# Altium PCB Art_Imp.PcbDoc
Units mm, origin at the board's own origin, x right, y up, seen from the top; angles counter-clockwise.
Board outline 65 x 59 mm, 2 copper layers (Top Layer, Bottom Layer); 38 components, 21 nets, 110 pads, 848 vias.
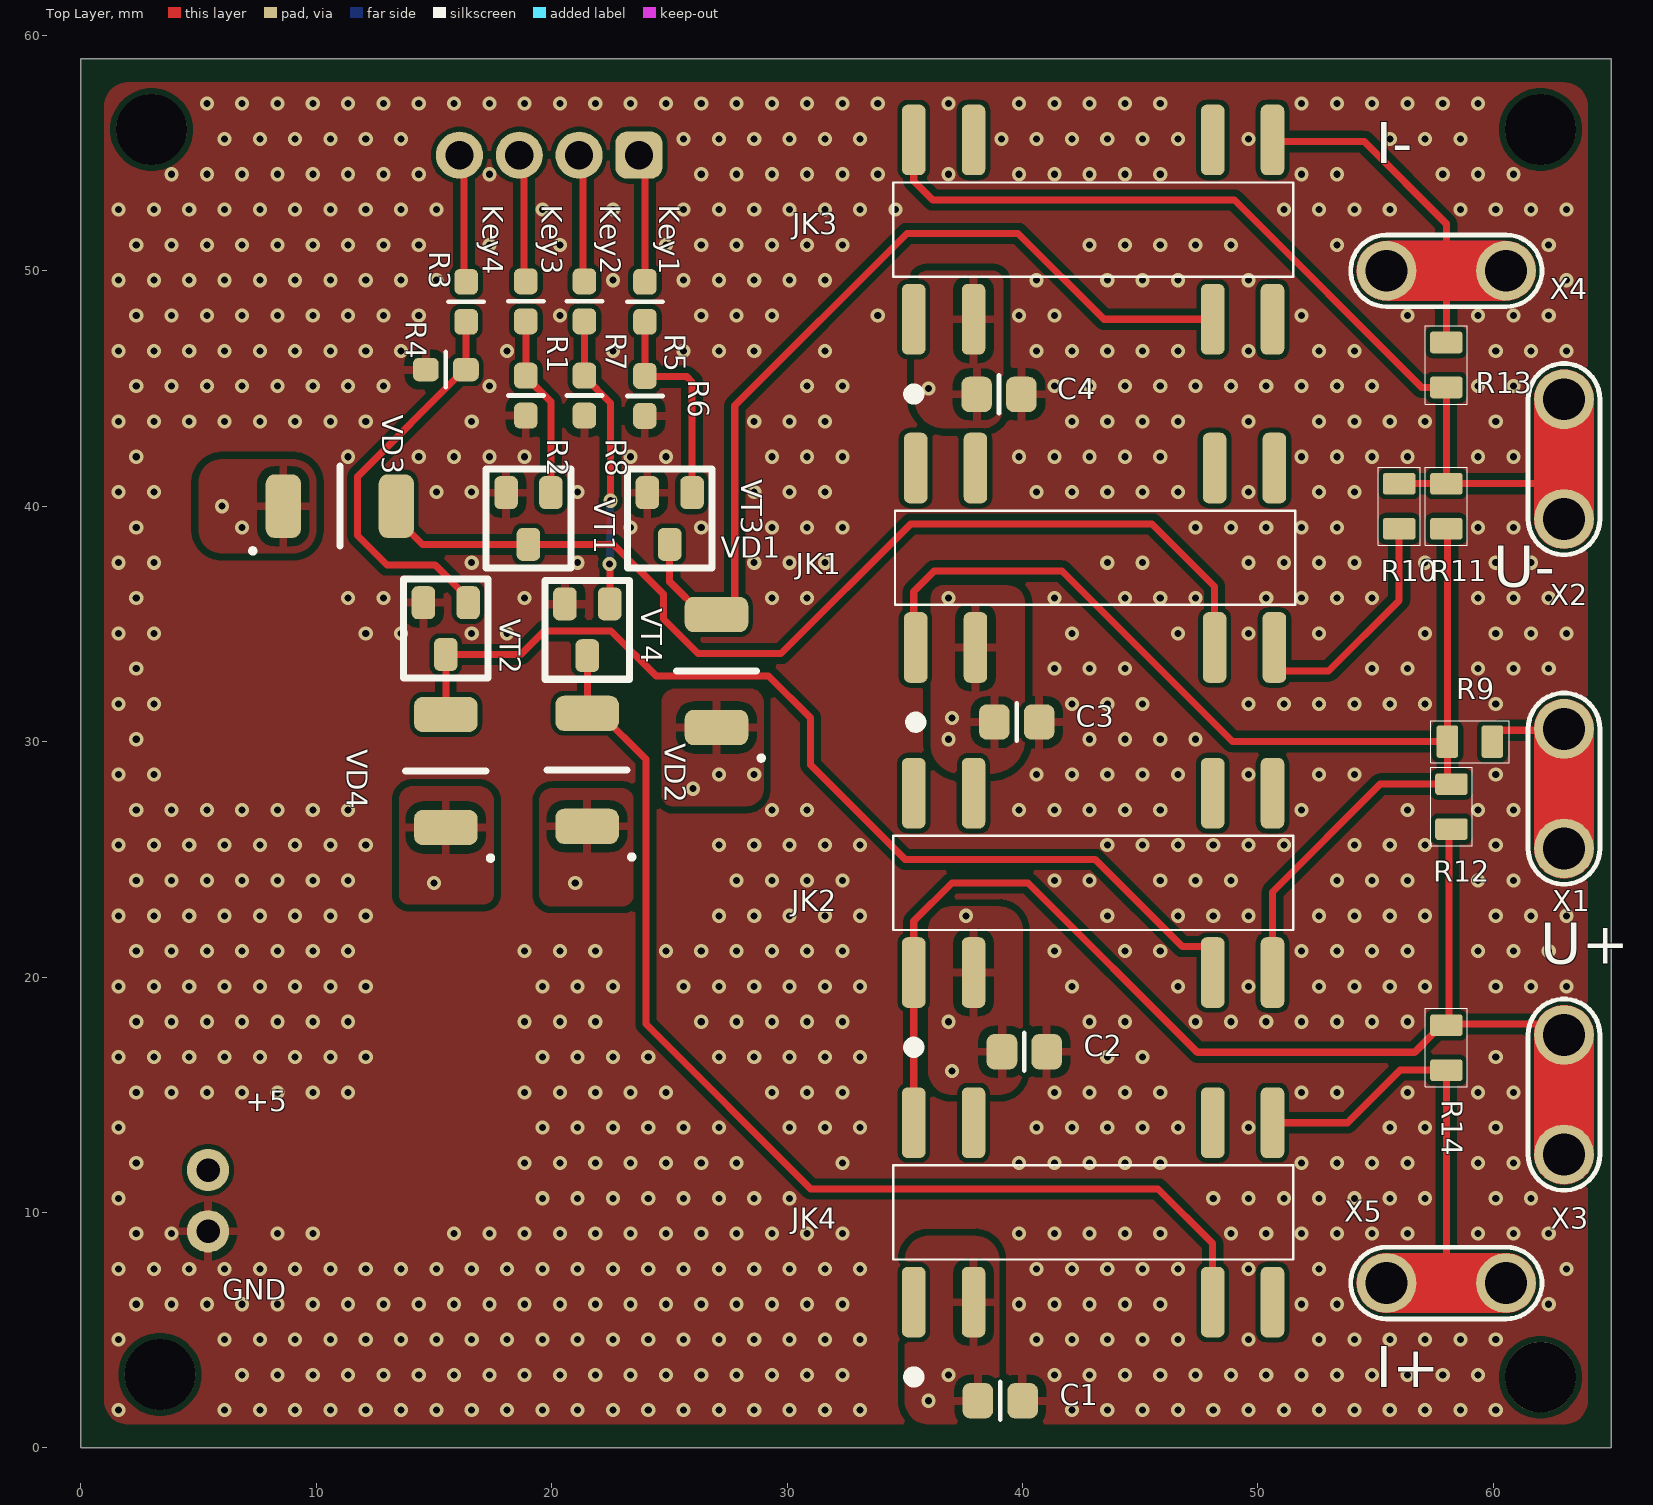
[diagram p0: Top Layer view]
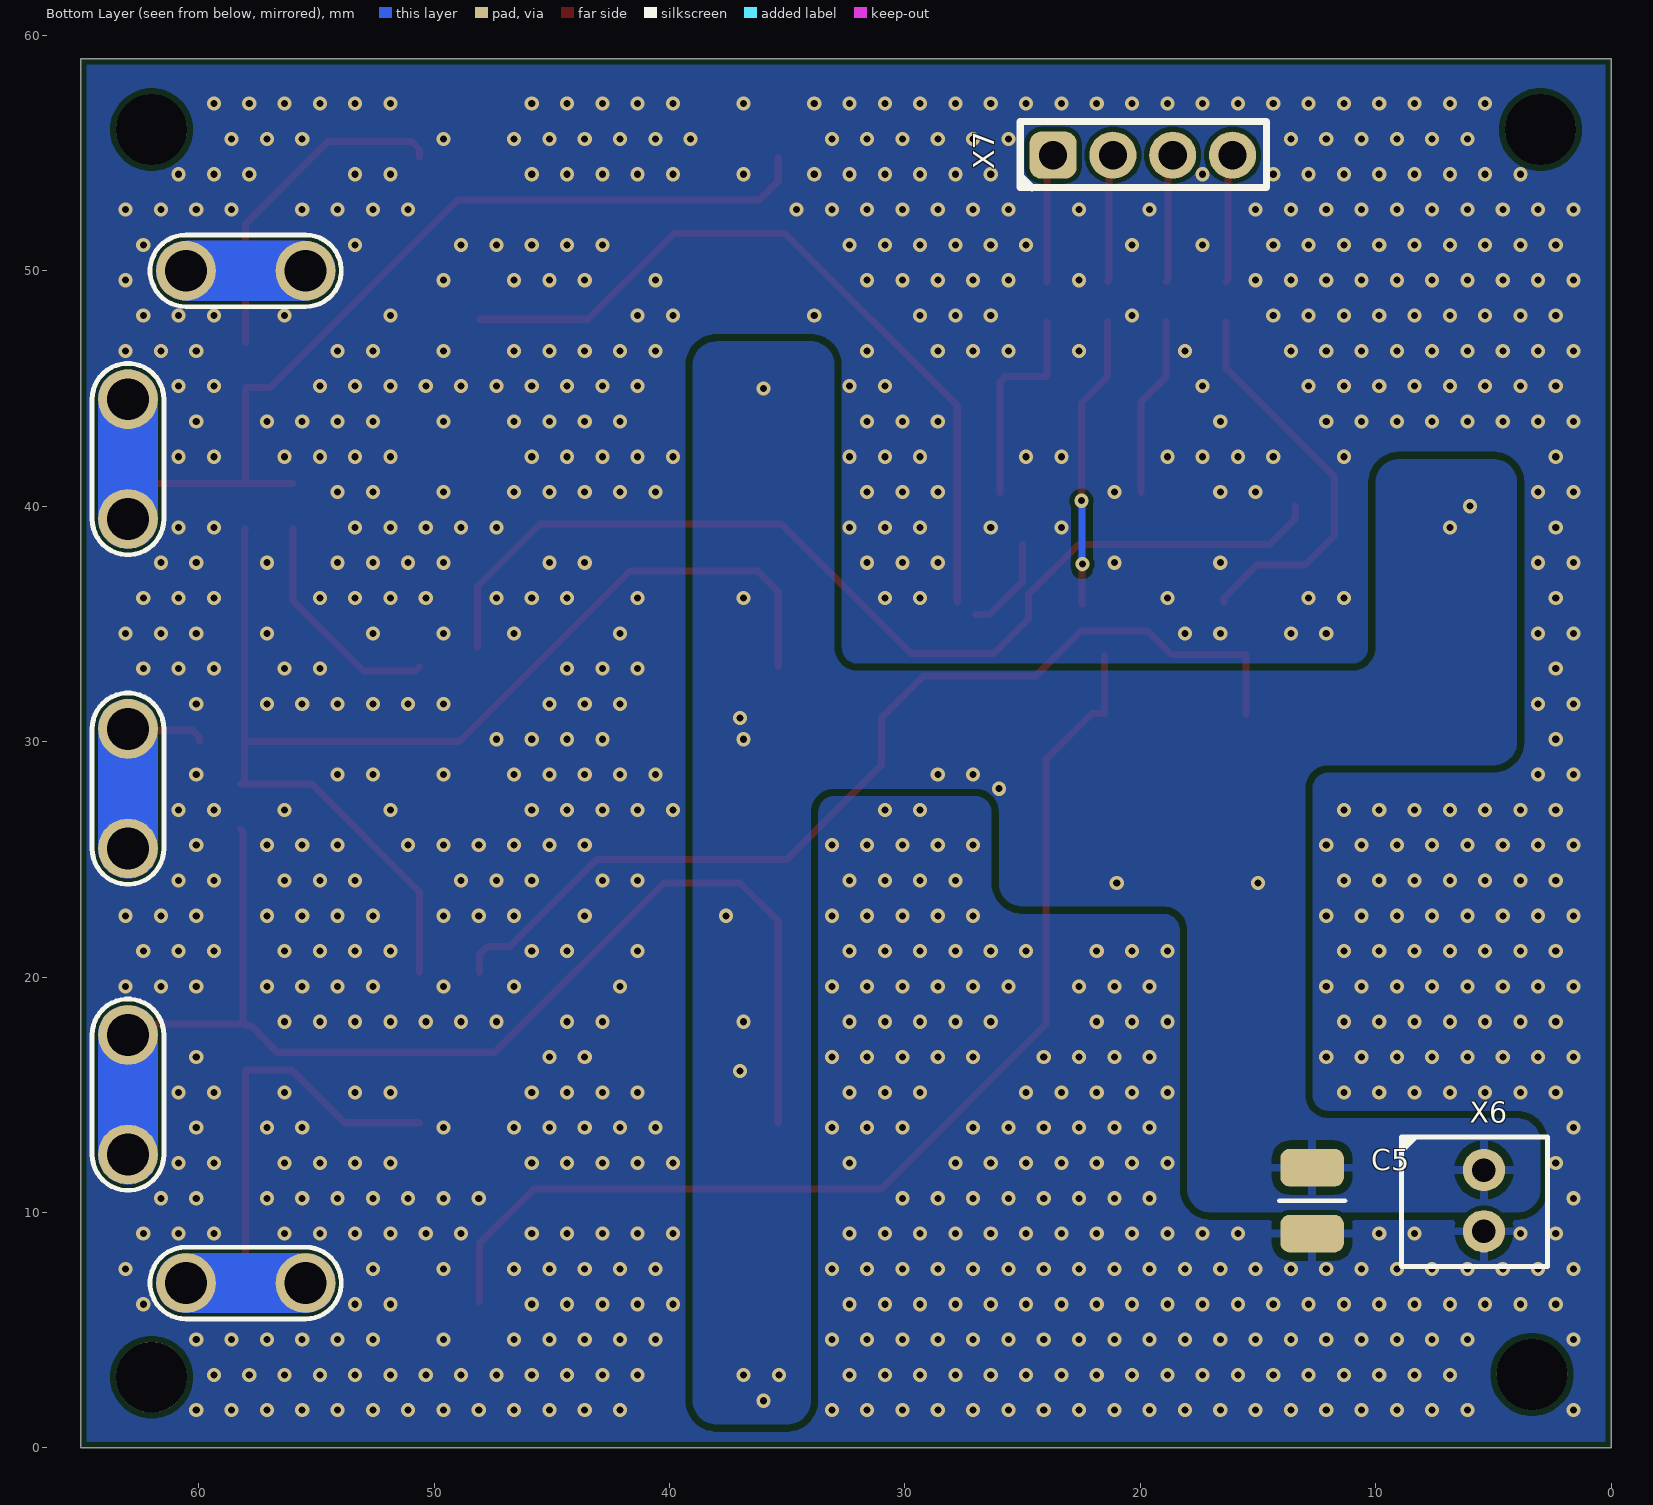
[diagram p1: Bottom Layer view, seen from below]

## Layer stack, top to bottom
Top Solder: solder mask 0.025, SM-004, Dk 4
Top Layer: signal copper 0.0175
Dielectric 1: dielectric 0.32, FR-4, Dk 4.8
Bottom Layer: signal copper 0.0175
Bottom Solder: solder mask 0.025, SM-004, Dk 4

## Board outline
0,0 65,0 65,59 0,59

## Design rules (kind name [scope] priority, off if disabled: settings)
AcuteAngle [All] p1: minimum=3.50000000000000E+0001 checktracksonly=FALSE
BoardOutlineClearance "BoardOutlineClearance 1" [All] p1: gap=0.25 ignorepadtopadclearanceinfootprint=FALSE except(0: Arc-SplitContinuation Track-SplitContinuation SMDPad-SplitContinuation THPad-SplitContinuation Via-SplitContinuation Fill-SplitContinuation Poly-SplitContinuation Region-SplitContinuation Text-SplitContinuation) // Milling
BoardOutlineClearance "BoardOutlineClearance 2" [All] p2: gap=0.4 ignorepadtopadclearanceinfootprint=FALSE except(0: Arc-SplitContinuation Track-SplitContinuation SMDPad-SplitContinuation THPad-SplitContinuation Via-SplitContinuation Fill-SplitContinuation Poly-SplitContinuation Region-SplitContinuation Text-SplitContinuation) // V-Cut
Clearance "Clearance 3 Oz" [InNet('No Net') vs InNet('No Net')] p1 off: gap=0.35 ignorepadtopadclearanceinfootprint=FALSE except(0.25: Arc-Hole Track-Hole SMDPad-Hole THPad-Hole Via-Hole Fill-Hole Poly-Hole Region-Hole Text-Hole)
Clearance "Clearance 2 Oz" [InNet('No Net') vs InNet('No Net')] p2 off: gap=0.3 ignorepadtopadclearanceinfootprint=FALSE except(0.25: Arc-Hole Track-Hole SMDPad-Hole THPad-Hole Via-Hole Fill-Hole Poly-Hole Region-Hole Text-Hole)
Clearance "Clearance-1 1 Oz" [All] p3: gap=0.2 ignorepadtopadclearanceinfootprint=FALSE except(0.25: Arc-Hole Track-Hole SMDPad-Hole THPad-Hole Via-Hole Fill-Hole Poly-Hole Region-Hole Text-Hole; 0.3: Arc-Fill Arc-Poly Arc-Region Track-Fill Track-Poly Track-Region Fill-Fill Fill-Poly Fill-Region Poly-Poly Poly-Region Region-Region) // Standart
Clearance "Clearance-2 1 Oz" [InNet('No Net') vs InNet('No Net')] p4: gap=0.15 ignorepadtopadclearanceinfootprint=FALSE except(0.2: Arc-Fill Arc-Poly Track-Fill Track-Poly SMDPad-Fill SMDPad-Poly THPad-Fill THPad-Poly Via-Fill Via-Poly Fill-Fill Fill-Poly Poly-Poly; 0.25: Arc-Hole Track-Hole SMDPad-Hole THPad-Hole Via-Hole Fill-Hole Poly-Hole Region-Hole Text-Hole) // Advance
Clearance "Clearance-1 1/2 Oz" [InNet('No Net') vs InNet('No Net')] p5: gap=0.125 ignorepadtopadclearanceinfootprint=FALSE except(0.2: Arc-Fill Arc-Poly Track-Fill Track-Poly SMDPad-SMDPad SMDPad-Fill SMDPad-Poly THPad-Fill THPad-Poly Via-Fill Via-Poly Fill-Fill Fill-Poly Poly-Poly Poly-Region Poly-Text; 0.25: Arc-Hole Track-Hole SMDPad-Hole THPad-Hole Via-Hole Fill-Hole Poly-Hole Region-Hole Text-Hole) // Standart
Clearance "Clearance-2 1/2 Oz" [InNet('No Net') vs InNet('No Net')] p6: gap=0.1 ignorepadtopadclearanceinfootprint=FALSE except(0.15: Arc-Fill Arc-Poly Track-Fill Track-Poly SMDPad-SMDPad SMDPad-Fill SMDPad-Poly THPad-Fill THPad-Poly Via-Fill Via-Poly Fill-Fill Fill-Poly Poly-Poly Poly-Region Poly-Text; 0.25: Arc-Hole Track-Hole SMDPad-Hole THPad-Hole Via-Hole Fill-Hole Poly-Hole Region-Hole Text-Hole) // Advance
DiffPairsRouting "DiffPairsRouting 1 Oz" [All] p1: maxlimit=0.254 minlimit=0.2 mostfreqgap=0.254 toplayer_minwidth=0.2 toplayer_maxwidth=0.381 toplayer_prefwidth=0.381 bottomlayer_minwidth=0.2 bottomlayer_maxwidth=0.381 bottomlayer_prefwidth=0.381 maxuncoupledlength=12.7
DiffPairsRouting "DiffPairsRouting 1/2 Oz" [All] p2: maxlimit=0.254 minlimit=0.1 mostfreqgap=0.254 toplayer_minwidth=0.1 toplayer_maxwidth=0.381 toplayer_prefwidth=0.381 bottomlayer_minwidth=0.1 bottomlayer_maxwidth=0.381 bottomlayer_prefwidth=0.381 maxuncoupledlength=12.7
HoleSize "Minimum HoleSize" [IsPad] p1: absolutevalues=TRUE maxlimit=5.9 minlimit=0.6 maxpercent=80.000 minpercent=20.000
HoleSize "Minimum HoleSize VIA 1" [IsVia] p2: absolutevalues=TRUE maxlimit=5.9 minlimit=0.3 maxpercent=80.000 minpercent=20.000 // Standart
HoleSize "Minimum HoleSize VIA 2" [IsVia] p3: absolutevalues=TRUE maxlimit=5.9 minlimit=0.2 maxpercent=80.000 minpercent=20.000 // Advance
HoleToHoleClearance Hole2HoleClearance [All] p1: gap=0.25 allowstackedmicrovias=FALSE
MinimumAnnularRing "Minimum AR VIA Standart" [IsVia] p1: minimumring=0.15
MinimumAnnularRing "Minimum AR PAD Standart" [IsPAD] p2: minimumring=0.2
MinimumAnnularRing "Minimum AR VIA Advance" [IsVia] p3: minimumring=0.1
MinimumAnnularRing "Minimum AR PAD Advance" [IsPAD] p4: minimumring=0.15
MinimumSolderMaskSliver "SolderMask Bridge Standart" [All] p1: minsoldermaskwidth=0.1 // All Masks
MinimumSolderMaskSliver "SolderMask Bridge Advance" [All] p2: minsoldermaskwidth=0.1 // Mask LDI
PlaneClearance "PlaneClearance 3 Oz" [InNet('No Net')] p1: clearance=0.35
PlaneClearance "PlaneClearance 2 Oz" [InNet('No Net')] p2: clearance=0.3
PlaneClearance "PlaneClearance 1 Oz" [All] p3: clearance=0.2
PlaneClearance "PlaneClearance-1 1/2 Oz" [InNet('No Net')] p4: clearance=0.2 // Standart
PlaneClearance "PlaneClearance-2 1/2 Oz" [InNet('No Net')] p5: clearance=0.15 // Advance
PlaneConnect "TermalConnect 3 Oz" [All] p1: planeconnectstyle=Relief reliefexpansion=0.2 reliefentries=4 reliefconductorwidth=0.35 reliefairgap=0.35 // Standart
PlaneConnect "TermalConnect 2 Oz" [All] p2: planeconnectstyle=Relief reliefexpansion=0.2 reliefentries=4 reliefconductorwidth=0.3 reliefairgap=0.3 // Standart
PlaneConnect "TermalConnect-1 1 Oz" [All] p3: planeconnectstyle=Relief reliefexpansion=0.2 reliefentries=4 reliefconductorwidth=0.2 reliefairgap=0.2 // Standart
PlaneConnect "TermalConnect-2 1 Oz" [All] p4: pad.planeconnectstyle=Relief pad.reliefexpansion=0.15 pad.reliefentries=4 pad.reliefconductorwidth=0.2 pad.reliefairgap=0.2 via.planeconnectstyle=Direct via.reliefexpansion=0.15 via.reliefentries=4 via.reliefconductorwidth=0.15 via.reliefairgap=0.15 // Advance
PlaneConnect "TermalConnect-1 1/2 Oz" [All] p5: planeconnectstyle=Relief reliefexpansion=0.2 reliefentries=4 reliefconductorwidth=0.2 reliefairgap=0.2 // Standart
PlaneConnect "TermalConnect-2 1/2 Oz" [All] p6: pad.planeconnectstyle=Relief pad.reliefexpansion=0.15 pad.reliefentries=4 pad.reliefconductorwidth=0.15 pad.reliefairgap=0.15 via.planeconnectstyle=Direct via.reliefexpansion=0.15 via.reliefentries=4 via.reliefconductorwidth=0.15 via.reliefairgap=0.15 // Advance
PolygonConnect "PolygonConnect 3 Oz" [All] p1: thpad.connectstyle=Relief thpad.reliefconductorwidth=0.35 thpad.reliefentries=4 thpad.polygonreliefangle="90 Angle" thpad.airgapwidth=0.35 smdpad.connectstyle=Relief smdpad.reliefconductorwidth=0.35 smdpad.reliefentries=4 smdpad.polygonreliefangle="90 Angle" smdpad.airgapwidth=0.35 via.connectstyle=Direct via.reliefconductorwidth=0.254 via.reliefentries=4 via.polygonreliefangle="90 Angle" via.airgapwidth=0.254
PolygonConnect "PolygonConnect 2 Oz" [InNet('No Net') vs InNet('No Net')] p2: thpad.connectstyle=Relief thpad.reliefconductorwidth=0.3 thpad.reliefentries=4 thpad.polygonreliefangle="90 Angle" thpad.airgapwidth=0.3 smdpad.connectstyle=Relief smdpad.reliefconductorwidth=0.3 smdpad.reliefentries=4 smdpad.polygonreliefangle="90 Angle" smdpad.airgapwidth=0.3 via.connectstyle=Direct via.reliefconductorwidth=0.254 via.reliefentries=4 via.polygonreliefangle="90 Angle" via.airgapwidth=0.254
PolygonConnect "PolygonConnect-1 1 Oz" [InNet('No Net') vs InNet('No Net')] p3: thpad.connectstyle=Relief thpad.reliefconductorwidth=0.2 thpad.reliefentries=4 thpad.polygonreliefangle="90 Angle" thpad.airgapwidth=0.2 smdpad.connectstyle=Relief smdpad.reliefconductorwidth=0.2 smdpad.reliefentries=4 smdpad.polygonreliefangle="90 Angle" smdpad.airgapwidth=0.2 via.connectstyle=Direct via.reliefconductorwidth=0.254 via.reliefentries=4 via.polygonreliefangle="90 Angle" via.airgapwidth=0.254 // Standart
PolygonConnect "PolygonConnect-2 1 Oz" [InNet('No Net') vs InNet('No Net')] p4: thpad.connectstyle=Relief thpad.reliefconductorwidth=0.15 thpad.reliefentries=4 thpad.polygonreliefangle="90 Angle" thpad.airgapwidth=0.15 smdpad.connectstyle=Relief smdpad.reliefconductorwidth=0.15 smdpad.reliefentries=4 smdpad.polygonreliefangle="90 Angle" smdpad.airgapwidth=0.15 via.connectstyle=Direct via.reliefconductorwidth=0.254 via.reliefentries=4 via.polygonreliefangle="90 Angle" via.airgapwidth=0.254 // Advance
PolygonConnect "PolygonConnect-1 1/2 Oz" [InNet('No Net') vs InNet('No Net')] p5: thpad.connectstyle=Relief thpad.reliefconductorwidth=0.15 thpad.reliefentries=4 thpad.polygonreliefangle="90 Angle" thpad.airgapwidth=0.2 smdpad.connectstyle=Relief smdpad.reliefconductorwidth=0.2 smdpad.reliefentries=4 smdpad.polygonreliefangle="90 Angle" smdpad.airgapwidth=0.2 via.connectstyle=Direct via.reliefconductorwidth=0.254 via.reliefentries=4 via.polygonreliefangle="90 Angle" via.airgapwidth=0.254 // Standart
PolygonConnect "PolygonConnect-2 1/2 Oz" [InNet('No Net') vs InNet('No Net')] p6: thpad.connectstyle=Relief thpad.reliefconductorwidth=0.125 thpad.reliefentries=4 thpad.polygonreliefangle="90 Angle" thpad.airgapwidth=0.15 smdpad.connectstyle=Relief smdpad.reliefconductorwidth=0.125 smdpad.reliefentries=4 smdpad.polygonreliefangle="90 Angle" smdpad.airgapwidth=0.15 via.connectstyle=Direct via.reliefconductorwidth=0.254 via.reliefentries=4 via.polygonreliefangle="90 Angle" via.airgapwidth=0.254 // Advance
RoutingCorners [All] p1 off: cornerstyle=45-Degree minsetback=2.54 maxsetback=2.54
RoutingVias [All] p1: holewidth=0.3 width=0.6 viastyle="Through Hole" minholewidth=0.2 minwidth=0.4 maxholewidth=5.9 maxwidth=6.4
SilkToSilkClearance Silk2SilkClearance [All] p1 off: silktosilkclearance=0.15
SilkToSolderMaskClearance Silk2SolderMaskClearance [IsPad] p1 off: minsilkscreentomaskgap=0.15 clearancetoexposedcopper=TRUE
SolderMaskExpansion SolderMaskExpansion-1 [All] p1: expansion=0.05 istentingtop=FALSE // Standart
SolderMaskExpansion "SolderMaskExpansion LDI" [All] p2: expansion=0.025 istentingtop=FALSE // Advance
SupplyNets "Schematic Supply Nets_1" [InNet('+5')] p1: voltage=0.000
SupplyNets "Schematic Supply Nets" [InNet('GNDA')] p2: voltage=0.000
UnRoutedNet [All] p1: checkbadconnections=TRUE
Width "Width 3 Oz" [All] p1 off: maxlimit=10 minlimit=0.3 preferedwidth=0.4 minimp=50.000000 maximp=50.000000 favimp=50.000000 checkconnectedcopper=TRUE
Width "Width 2 Oz" [All] p2 off: maxlimit=10 minlimit=0.3 preferedwidth=0.35 minimp=50.000000 maximp=50.000000 favimp=50.000000 checkconnectedcopper=TRUE
Width "Width 1 Oz" [All] p3: maxlimit=10 minlimit=0.15 preferedwidth=0.2 checkconnectedcopper=TRUE
Width "Width 1/2 Oz" [All] p4: maxlimit=10 minlimit=0.1 preferedwidth=0.125 checkconnectedcopper=TRUE
20 further rules are at their usual default settings.

## Components (designator, comment, footprint, x,y, rotation, side; value= is the part's Value field where it differs from the comment)
C1 "0.1u 50V 0805 ±10%" "CAP: SMD 0805 MD IPC 782" 39.05,2 r0 top
C2 "0.1u 50V 0805 ±10%" "CAP: SMD 0805 MD IPC 782" 40.075,16.825 r180 top
C3 "0.1u 50V 0805 ±10%" "CAP: SMD 0805 MD IPC 782" 39.751,30.83 r180 top
C4 "0.1u 50V 0805 ±10%" "CAP: SMD 0805 MD IPC 782" 39,44.75 r180 top
C5 "47u 16V 1210 ±20%" "CAP: SMD 1210 MD IPC 782" 12.7,10.5 r270 bottom
JK1 "TRR-1A-05-S-00R" TTR 43.083,37.81 r0 top
JK2 "TRR-1A-05-S-00R" TTR 43,24 r0 top
JK3 "TRR-1A-05-S-00R" TTR 43,51.75 r0 top
JK4 "TRR-1A-05-S-00R" TTR 43,10 r0 top
R1 "10k ±1% 0603" "RES: SMD 0603 MD IPC 782" 18.899,48.7 r90 top
R2 "10k ±1% 0603" "RES: SMD 0603 MD IPC 782" 18.899,44.7 r90 top
R3 "10k ±1% 0603" "RES: SMD 0603 MD IPC 782" 16.367,48.683 r90 top
R4 "10k ±1% 0603" "RES: SMD 0603 MD IPC 782" 15.5,45.8 r0 top
R5 "10k ±1% 0603" "RES: SMD 0603 MD IPC 782" 23.955,48.683 r90 top
R6 "10k ±1% 0603" "RES: SMD 0603 MD IPC 782" 23.955,44.683 r90 top
R7 "10k ±1% 0603" "RES: SMD 0603 MD IPC 782" 21.39,48.7 r90 top
R8 "10k ±1% 0603" "RES: SMD 0603 MD IPC 782" 21.39,44.7 r90 top
R9 "100R" 0805 59,30 r180 top
R10 "100R" 0805 56,40 r90 top
R11 "100R" 0805 58,40 r90 top
R12 "100R" 0805 58.219,27.239 r90 top
R13 "2.4k" 0805 58,46 r90 top
R14 "2.4k" 0805 58,17 r270 top
VD1 "SM4002-W 1A 100V" "DIODE: MELF" 27,33 r270 top
VD2 "SM4002-W 1A 100V" "DIODE: MELF" 21.5,28.8 r270 top
VD3 "SM4002-W 1A 100V" "DIODE: MELF" 11,40 r180 top
VD4 "SM4002-W 1A 100V" "DIODE: MELF" 15.5,28.75 r270 top
VT1 "BC850C" "IC: SOT 23" 19.012,39.475 r270 top
VT2 "BC850C" "IC: SOT 23" 15.5,34.8 r270 top
VT3 "BC850C" "IC: SOT 23" 25.012,39.475 r270 top
VT4 "BC850C" "IC: SOT 23" 21.512,34.75 r270 top
X1 "DJ4.8" DJ4.8 63,28 r90 top
X2 "DJ4.8" DJ4.8 63,42 r90 top
X3 "DJ4.8" DJ4.8 63,15 r270 top
X4 "DJ4.8" DJ4.8 58,50 r180 top
X5 "DJ4.8" DJ4.8 58,7 r0 top
X6 "WF-2" "CON: 2pin wf-2" 5.9,10.5 r270 bottom
X7 "PLS-4" "CON: 4pin PLS-4" 19.892,54.911 r180 bottom

## Footprints (in the part's own frame and the unit in brackets; to place one, negate y for a bottom-side part, rotate by r counter-clockwise, add the part's x,y. Pads: shape width x height; smd on the part's side, far side on the other; paste and mask are expansions set on the pad)
0805 [mm]
  rrect25% 0.92x1.38 smd: 1(-0.955,0) 2(0.955,0)
  silkscreen extent -1.67,-0.89 1.66,0.89, body extent -1,-0.63 1,0.63, height 0.5
"CAP: SMD 0805 MD IPC 782" [mm]
  rrect50% 1.3x1.5 smd: 1(-0.95,0) 2(0.95,0)
  silkscreen extent 0,-0.8 0,0.8, body extent -1.4,-0.63 1.4,0.63, height 0.8
"CAP: SMD 1210 MD IPC 782" [mm]
  rrect50% 1.6x2.7 smd: 1(-1.4,0) 2(1.4,0)
  silkscreen extent 0,-1.4 0,1.4, body extent -2.47,-1.25 2.47,1.25, height 1.61
"CON: 2pin wf-2" [mm]
  round 1.8 hole 1: 1(-1.3,0.5) 2(1.3,0.5)
  silkscreen extent -2.7,-3 2.8,3.2, body extent -2.49,-2.8 2.59,3, height 11.56
"CON: 4pin PLS-4" [mm]
  rrect50% 2x2 hole 1.2: 1(-3.81,0)
  round 2 hole 1.2: 2(-1.27,0) 3(1.27,0) 4(3.81,0)
  silkscreen extent -5.21,-1.39 5.25,1.42, body extent -5.08,-1.3 5.08,1.3, height 7.83
"DIODE: MELF" [mm]
  rrect50% 1.5x2.7 smd: 1(2.4,0) 2(-2.4,0)
  silkscreen extent 0,-1.7 3.8,2, body extent -2.49,-1.24 2.51,1.24, height 2.5
DJ4.8 [mil]
  round 100 hole 70 mask+2: 1(-100,0) 1(100,0)
  Top Layer region: -150,0 -143.3,25 -125,43.3 -100,50 -100,50 100,50 119.13,46.2 135.36,35.36 146.2,19.13 150,0 150,0 146.2,-19.14 135.36,-35.36 119.13,-46.2 100,-50 100,-50 -100,-50 -119.13,-46.19 -135.36,-35.36 -146.19,-19.13 -150,0
  Bottom Layer region: -150,0 -143.3,25 -125,43.3 -100,50 -100,50 100,50 119.13,46.2 135.36,35.36 146.2,19.13 150,0 150,0 146.2,-19.14 135.36,-35.36 119.13,-46.2 100,-50 100,-50 -100,-50 -119.13,-46.19 -135.36,-35.36 -146.19,-19.13 -150,0
  silkscreen extent -160,-60 160,60, body extent -140,-16 140,16, height 362
"IC: SOT 23" [mm]
  rrect50% 1.4x1 smd: 1(-1.1,0.95) 2(-1.1,-0.95) 3(1.1,0)
  silkscreen extent -2.1,-1.8 2.1,1.8, body extent -1.32,-1.5 1.32,1.5, height 1.08
"RES: SMD 0603 MD IPC 782" [mm]
  rrect50% 1.1x1 smd: 1(-0.85,0) 2(0.85,0)
  silkscreen extent 0,-0.75 0,0.75, body extent -1.23,-0.4 1.23,0.4, height 0.8
TTR [mm]
  rrect50% 1x3 smd: 1(-7.623,-3.81) 2(-5.083,-3.81) 6(5.077,-3.81) 7(7.617,-3.81) 8(7.617,3.81) 9(5.077,3.81) 13(-5.083,3.81) 14(-7.623,3.81)
  silkscreen extent -8.5,-7.18 8.5,2, body extent -9.83,-4.78 9.67,4.84, height 5.5

## Part data
JK1 JK2 JK3 JK4: library part "Реле герконовые TRR-1A-05-S-00R", "Реле герконовые TRR-1A-05-S-00R", ComponentLink1Description=Chipdip, ComponentLink1URL=https://www.chipdip.ru/product/trr-1a-05-s-00r-tai-shing-tti-8001786496, P/N="Реле герконовые TRR-1A-05-S-00R, Tai Shing"
R9 R10 R11 R12: library part "100 0,05% 0805", "0805", ComponentLink1Description=Chipdip, ComponentLink1URL=https://www.chipdip.ru/product/rg1608n-131-w-t1-susumu-8001999350, P/N="Резистор RG2012N-101-W-T1, Susumu"
R13 R14: library part "2.4k 0,05% 0805", "0805", ComponentLink1Description=Chipdip, ComponentLink1URL=https://www.chipdip.ru/product/rg2012n-242-w-t1-susumu-8001999371, P/N="Резистор RG2012N-242-W-T1 Susumu"
VD1 VD2 VD3 VD4: library part "Rectifier 1A 100V", Code=6341199702, Name="Диод SM4002-W, RECTRON"
VT1 VT2 VT3 VT4: library part "BJT NPN BC850C", Code=6340001151, Name="Транзистор BC850C,215, Nexperia"
X1 X2 X3 X4 X5: library part "1 pin DJ4.8", "Клемма ножевая 4.8 мм"
X6: library part "2 pin WF-2", Code=6313952902, Name="Вилка WF-2"
X7: library part "4 pin PLS-4", Code=6313932041, Name="Вилка WF-4"
C1 C2 C3 C4: Code=6279254871, Name="Конденсатор X7R 50V 0,1uF ±10% 0805"
C5: Code=6289734921, Name="Конденсатор GRM32ER61C476ME15L"
R1 R2 R3 R4 R5 R6 R7 R8: Code=6069191961, Name="Резистор 10K+-1% TK50 0603"

## Free pads (board coordinates)
  round 3 hole 3 unplated: ""(3,56) ""(3.359,3.116) ""(62,3) ""(62,56)

## Via types
v1: diameter 0.6/0.6 (per signal layer), hole 0.3, Top Layer to Bottom Layer, 838 vias
v2: diameter 0.6, hole 0.3, Top Layer to Bottom Layer, 10 vias

## Nets (pads, with @x,y where several pads share a name; then routed paths per layer and width w, separated by ;. In a path a pad name is that pad's centre, name@x,y a point inside that pad or via, vN(x,y) a via of type N, cw(c..) or ccw(c..) an arc to the next point about the centre after c; other vN are vias at no path point)
+5: C1.1 C2.2 C3.2 C4.2 C5.1 JK1.2 JK2.2 JK3.2 JK4.2 VD1.1 VD2.1 VD3.1 VD4.1 X6.1
  other v1: 35.35,3.1 36.85,3.1 36.85,18.1 37.6,22.6 27.1,28.6 28.6,28.6 36.85,30.1 36.85,36.1 6.85,39.1
  other v2: 36,2 37,16 15,24 21,24 26,28 37,31 6,40 36,45
GNDA: C1.2 C2.1 C3.1 C4.1 C5.2 R2.1 R4.1 R6.1 R8.1 VT1.2 VT2.2 VT3.2 VT4.2 X6.2
  other v1: 1.6,1.6 6.1,1.6 7.6,1.6 9.1,1.6 10.6,1.6 12.1,1.6 13.6,1.6 15.1,1.6 16.6,1.6 18.1,1.6 19.6,1.6 21.1,1.6 22.6,1.6 24.1,1.6 25.6,1.6 27.1,1.6 28.6,1.6 30.1,1.6 31.6,1.6 33.1,1.6 42.1,1.6 43.6,1.6 45.1,1.6 46.6,1.6 48.1,1.6 49.6,1.6 51.1,1.6 52.6,1.6 54.1,1.6 55.6,1.6 57.1,1.6 58.6,1.6 60.1,1.6 6.85,3.1 8.35,3.1 9.85,3.1 11.35,3.1 12.85,3.1 14.35,3.1 15.85,3.1 17.35,3.1 18.85,3.1 20.35,3.1 21.85,3.1 23.35,3.1 24.85,3.1 26.35,3.1 27.85,3.1 29.35,3.1 30.85,3.1 32.35,3.1 41.35,3.1 42.85,3.1 44.35,3.1 45.85,3.1 47.35,3.1 48.85,3.1 50.35,3.1 51.85,3.1 53.35,3.1 54.85,3.1 56.35,3.1 57.85,3.1 59.35,3.1 1.6,4.6 6.1,4.6 7.6,4.6 9.1,4.6 10.6,4.6 12.1,4.6 13.6,4.6 15.1,4.6 16.6,4.6 18.1,4.6 19.6,4.6 21.1,4.6 22.6,4.6 24.1,4.6 25.6,4.6 27.1,4.6 28.6,4.6 30.1,4.6 31.6,4.6 33.1,4.6 40.6,4.6 42.1,4.6 43.6,4.6 45.1,4.6 46.6,4.6 49.6,4.6 52.6,4.6 54.1,4.6 55.6,4.6 57.1,4.6 58.6,4.6 60.1,4.6 2.35,6.1 3.85,6.1 5.35,6.1 6.85,6.1 8.35,6.1 9.85,6.1 11.35,6.1 12.85,6.1 14.35,6.1 15.85,6.1 17.35,6.1 18.85,6.1 20.35,6.1 21.85,6.1 23.35,6.1 24.85,6.1 26.35,6.1 27.85,6.1 29.35,6.1 30.85,6.1 32.35,6.1 39.85,6.1 41.35,6.1 42.85,6.1 44.35,6.1 45.85,6.1 51.85,6.1 53.35,6.1 62.35,6.1 1.6,7.6 3.1,7.6 4.6,7.6 6.1,7.6 7.6,7.6 9.1,7.6 10.6,7.6 12.1,7.6 13.6,7.6 15.1,7.6 16.6,7.6 18.1,7.6 19.6,7.6 21.1,7.6 22.6,7.6 24.1,7.6 25.6,7.6 27.1,7.6 28.6,7.6 30.1,7.6 31.6,7.6 33.1,7.6 40.6,7.6 42.1,7.6 43.6,7.6 45.1,7.6 46.6,7.6 49.6,7.6 52.6,7.6 63.1,7.6 2.35,9.1 3.85,9.1 8.35,9.1 9.85,9.1 15.85,9.1 17.35,9.1 18.85,9.1 20.35,9.1 21.85,9.1 23.35,9.1 24.85,9.1 26.35,9.1 27.85,9.1 29.35,9.1 30.85,9.1 32.35,9.1 39.85,9.1 41.35,9.1 42.85,9.1 44.35,9.1 45.85,9.1 48.85,9.1 50.35,9.1 51.85,9.1 53.35,9.1 54.85,9.1 56.35,9.1 59.35,9.1 60.85,9.1 62.35,9.1 1.6,10.6 19.6,10.6 21.1,10.6 22.6,10.6 24.1,10.6 25.6,10.6 27.1,10.6 28.6,10.6 30.1,10.6 48.1,10.6 49.6,10.6 51.1,10.6 52.6,10.6 54.1,10.6 55.6,10.6 57.1,10.6 60.1,10.6 61.6,10.6 2.35,12.1 18.85,12.1 20.35,12.1 21.85,12.1 23.35,12.1 24.85,12.1 26.35,12.1 27.85,12.1 32.35,12.1 39.85,12.1 41.35,12.1 42.85,12.1 44.35,12.1 45.85,12.1 51.85,12.1 53.35,12.1 54.85,12.1 56.35,12.1 59.35,12.1 60.85,12.1 1.6,13.6 19.6,13.6 21.1,13.6 22.6,13.6 24.1,13.6 25.6,13.6 27.1,13.6 30.1,13.6 31.6,13.6 33.1,13.6 40.6,13.6 42.1,13.6 43.6,13.6 45.1,13.6 46.6,13.6 49.6,13.6 55.6,13.6 57.1,13.6 60.1,13.6 2.35,15.1 3.85,15.1 5.35,15.1 6.85,15.1 8.35,15.1 9.85,15.1 11.35,15.1 18.85,15.1 20.35,15.1 21.85,15.1 23.35,15.1 24.85,15.1 29.35,15.1 30.85,15.1 32.35,15.1 41.35,15.1 42.85,15.1 44.35,15.1 45.85,15.1 51.85,15.1 53.35,15.1 56.35,15.1 59.35,15.1 60.85,15.1 1.6,16.6 3.1,16.6 4.6,16.6 6.1,16.6 7.6,16.6 9.1,16.6 10.6,16.6 12.1,16.6 19.6,16.6 21.1,16.6 22.6,16.6 24.1,16.6 27.1,16.6 28.6,16.6 30.1,16.6 31.6,16.6 33.1,16.6 43.6,16.6 45.1,16.6 60.1,16.6 2.35,18.1 3.85,18.1 5.35,18.1 6.85,18.1 8.35,18.1 9.85,18.1 11.35,18.1 18.85,18.1 20.35,18.1 21.85,18.1 26.35,18.1 27.85,18.1 29.35,18.1 30.85,18.1 32.35,18.1 42.85,18.1 44.35,18.1 47.35,18.1 48.85,18.1 50.35,18.1 51.85,18.1 53.35,18.1 54.85,18.1 56.35,18.1 1.6,19.6 3.1,19.6 4.6,19.6 6.1,19.6 7.6,19.6 9.1,19.6 10.6,19.6 12.1,19.6 19.6,19.6 21.1,19.6 22.6,19.6 25.6,19.6 27.1,19.6 28.6,19.6 30.1,19.6 31.6,19.6 33.1,19.6 42.1,19.6 46.6,19.6 49.6,19.6 52.6,19.6 54.1,19.6 55.6,19.6 57.1,19.6 60.1,19.6 61.6,19.6 63.1,19.6 2.35,21.1 3.85,21.1 5.35,21.1 6.85,21.1 8.35,21.1 9.85,21.1 11.35,21.1 18.85,21.1 20.35,21.1 21.85,21.1 24.85,21.1 26.35,21.1 27.85,21.1 29.35,21.1 30.85,21.1 32.35,21.1 41.35,21.1 44.35,21.1 45.85,21.1 51.85,21.1 53.35,21.1 54.85,21.1 56.35,21.1 59.35,21.1 60.85,21.1 62.35,21.1 1.6,22.6 3.1,22.6 4.6,22.6 6.1,22.6 7.6,22.6 9.1,22.6 10.6,22.6 12.1,22.6 27.1,22.6 28.6,22.6 30.1,22.6 31.6,22.6 33.1,22.6 43.6,22.6 46.6,22.6 48.1,22.6 49.6,22.6 52.6,22.6 54.1,22.6 55.6,22.6 57.1,22.6 60.1,22.6 61.6,22.6 63.1,22.6 2.35,24.1 3.85,24.1 5.35,24.1 6.85,24.1 8.35,24.1 9.85,24.1 11.35,24.1 27.85,24.1 29.35,24.1 30.85,24.1 32.35,24.1 41.35,24.1 42.85,24.1 45.85,24.1 47.35,24.1 48.85,24.1 53.35,24.1 54.85,24.1 56.35,24.1 59.35,24.1 60.85,24.1 1.6,25.6 3.1,25.6 4.6,25.6 6.1,25.6 7.6,25.6 9.1,25.6 10.6,25.6 12.1,25.6 27.1,25.6 28.6,25.6 30.1,25.6 31.6,25.6 33.1,25.6 43.6,25.6 45.1,25.6 46.6,25.6 48.1,25.6 49.6,25.6 51.1,25.6 54.1,25.6 55.6,25.6 57.1,25.6 60.1,25.6 2.35,27.1 3.85,27.1 5.35,27.1 6.85,27.1 8.35,27.1 9.85,27.1 11.35,27.1 29.35,27.1 30.85,27.1 39.85,27.1 41.35,27.1 42.85,27.1 44.35,27.1 45.85,27.1 51.85,27.1 56.35,27.1 59.35,27.1 60.85,27.1 1.6,28.6 3.1,28.6 40.6,28.6 42.1,28.6 43.6,28.6 45.1,28.6 46.6,28.6 49.6,28.6 52.6,28.6 54.1,28.6 60.1,28.6 2.35,30.1 42.85,30.1 44.35,30.1 45.85,30.1 47.35,30.1 1.6,31.6 3.1,31.6 42.1,31.6 43.6,31.6 45.1,31.6 49.6,31.6 51.1,31.6 52.6,31.6 54.1,31.6 55.6,31.6 57.1,31.6 60.1,31.6 2.35,33.1 41.35,33.1 42.85,33.1 44.35,33.1 54.85,33.1 56.35,33.1 59.35,33.1 60.85,33.1 62.35,33.1 1.6,34.6 3.1,34.6 12.1,34.6 13.6,34.6 16.6,34.6 18.1,34.6 42.1,34.6 46.6,34.6 49.6,34.6 52.6,34.6 57.1,34.6 60.1,34.6 61.6,34.6 63.1,34.6 2.35,36.1 11.35,36.1 12.85,36.1 18.85,36.1 29.35,36.1 30.85,36.1 41.35,36.1 44.35,36.1 45.85,36.1 47.35,36.1 50.35,36.1 51.85,36.1 53.35,36.1 54.85,36.1 59.35,36.1 60.85,36.1 62.35,36.1 1.6,37.6 3.1,37.6 16.6,37.6 21.1,37.6 28.6,37.6 30.1,37.6 31.6,37.6 43.6,37.6 45.1,37.6 49.6,37.6 51.1,37.6 52.6,37.6 54.1,37.6 57.1,37.6 60.1,37.6 61.6,37.6 2.35,39.1 23.35,39.1 26.35,39.1 29.35,39.1 30.85,39.1 32.35,39.1 47.35,39.1 48.85,39.1 50.35,39.1 51.85,39.1 53.35,39.1 59.35,39.1 60.85,39.1 1.6,40.6 3.1,40.6 15.1,40.6 16.6,40.6 21.1,40.6 28.6,40.6 30.1,40.6 31.6,40.6 40.6,40.6 42.1,40.6 43.6,40.6 45.1,40.6 46.6,40.6 49.6,40.6 52.6,40.6 54.1,40.6 2.35,42.1 11.35,42.1 14.35,42.1 15.85,42.1 17.35,42.1 18.85,42.1 23.35,42.1 24.85,42.1 29.35,42.1 30.85,42.1 32.35,42.1 39.85,42.1 41.35,42.1 42.85,42.1 44.35,42.1 45.85,42.1 51.85,42.1 53.35,42.1 54.85,42.1 56.35,42.1 59.35,42.1 60.85,42.1 1.6,43.6 3.1,43.6 4.6,43.6 6.1,43.6 7.6,43.6 9.1,43.6 10.6,43.6 12.1,43.6 16.6,43.6 28.6,43.6 30.1,43.6 31.6,43.6 42.1,43.6 43.6,43.6 45.1,43.6 46.6,43.6 49.6,43.6 52.6,43.6 54.1,43.6 55.6,43.6 57.1,43.6 60.1,43.6 2.35,45.1 3.85,45.1 5.35,45.1 6.85,45.1 8.35,45.1 9.85,45.1 11.35,45.1 12.85,45.1 17.35,45.1 30.85,45.1 32.35,45.1 41.35,45.1 42.85,45.1 44.35,45.1 45.85,45.1 47.35,45.1 48.85,45.1 50.35,45.1 51.85,45.1 53.35,45.1 54.85,45.1 59.35,45.1 60.85,45.1 1.6,46.6 3.1,46.6 4.6,46.6 6.1,46.6 7.6,46.6 9.1,46.6 10.6,46.6 12.1,46.6 13.6,46.6 18.1,46.6 22.6,46.6 25.6,46.6 27.1,46.6 28.6,46.6 31.6,46.6 40.6,46.6 42.1,46.6 43.6,46.6 45.1,46.6 46.6,46.6 49.6,46.6 52.6,46.6 54.1,46.6 60.1,46.6 61.6,46.6 63.1,46.6 2.35,48.1 3.85,48.1 5.35,48.1 6.85,48.1 8.35,48.1 9.85,48.1 11.35,48.1 12.85,48.1 14.35,48.1 20.35,48.1 26.35,48.1 27.85,48.1 29.35,48.1 33.85,48.1 39.85,48.1 41.35,48.1 51.85,48.1 56.35,48.1 59.35,48.1 60.85,48.1 62.35,48.1 1.6,49.6 3.1,49.6 4.6,49.6 6.1,49.6 7.6,49.6 9.1,49.6 10.6,49.6 12.1,49.6 13.6,49.6 15.1,49.6 22.6,49.6 25.6,49.6 27.1,49.6 28.6,49.6 30.1,49.6 31.6,49.6 40.6,49.6 43.6,49.6 45.1,49.6 46.6,49.6 49.6,49.6 63.1,49.6 2.35,51.1 3.85,51.1 5.35,51.1 6.85,51.1 8.35,51.1 9.85,51.1 11.35,51.1 12.85,51.1 14.35,51.1 17.35,51.1 20.35,51.1 24.85,51.1 26.35,51.1 27.85,51.1 29.35,51.1 30.85,51.1 32.35,51.1 42.85,51.1 44.35,51.1 45.85,51.1 47.35,51.1 48.85,51.1 53.35,51.1 62.35,51.1 1.6,52.6 3.1,52.6 4.6,52.6 6.1,52.6 7.6,52.6 9.1,52.6 10.6,52.6 12.1,52.6 13.6,52.6 15.1,52.6 19.6,52.6 22.6,52.6 25.6,52.6 27.1,52.6 28.6,52.6 30.1,52.6 31.6,52.6 33.1,52.6 34.6,52.6 51.1,52.6 52.6,52.6 54.1,52.6 55.6,52.6 58.6,52.6 60.1,52.6 61.6,52.6 63.1,52.6 3.85,54.1 5.35,54.1 6.85,54.1 8.35,54.1 9.85,54.1 11.35,54.1 12.85,54.1 14.35,54.1 17.35,54.1 26.35,54.1 27.85,54.1 29.35,54.1 30.85,54.1 32.35,54.1 33.85,54.1 36.85,54.1 39.85,54.1 41.35,54.1 42.85,54.1 44.35,54.1 45.85,54.1 51.85,54.1 53.35,54.1 57.85,54.1 59.35,54.1 60.85,54.1 6.1,55.6 7.6,55.6 9.1,55.6 10.6,55.6 12.1,55.6 13.6,55.6 25.6,55.6 27.1,55.6 28.6,55.6 30.1,55.6 31.6,55.6 33.1,55.6 39.1,55.6 40.6,55.6 42.1,55.6 43.6,55.6 45.1,55.6 46.6,55.6 49.6,55.6 55.6,55.6 57.1,55.6 58.6,55.6 5.35,57.1 6.85,57.1 8.35,57.1 9.85,57.1 11.35,57.1 12.85,57.1 14.35,57.1 15.85,57.1 17.35,57.1 18.85,57.1 20.35,57.1 21.85,57.1 23.35,57.1 24.85,57.1 26.35,57.1 27.85,57.1 29.35,57.1 30.85,57.1 32.35,57.1 33.85,57.1 36.85,57.1 39.85,57.1 41.35,57.1 42.85,57.1 44.35,57.1 45.85,57.1 51.85,57.1 53.35,57.1 54.85,57.1 56.35,57.1 57.85,57.1 59.35,57.1
Key1: R5.2 X7.1 | length 5.1
  Top Layer w0.3: R5.2 X7.1@23.955,54.655
Key2: R7.2 X7.2 | length 5.2
  Top Layer w0.3: X7.2@21.33,54.74 21.33,49.61 R7.2
Key3: R1.2 X7.3 | length 5.2
  Top Layer w0.3: X7.3@18.814,54.716 18.814,49.634 R1.2
Key4: R3.2 X7.4 | length 5.2
  Top Layer w0.3: X7.4@16.278,54.712 16.278,49.622 R3.2
NetJK1_1: JK1.1 JK2.7 R9.2 R11.1 R12.2 | length 53.1
  Top Layer w0.3: JK1.1@35.377,33.19 35.377,36.377 36.25,37.25 41.668,37.25 48.918,30 R9.2 ; JK2.7 50.617,23.617 55.194,28.194 R12.2 58.045,28.368 R9.2 ; R11.1 58.045,39 R9.2
NetJK1_6: JK1.6 VD3.2 VT1.3 | length 44.2
  Top Layer w0.3: VD3.2 13.4,39.479 14.504,38.375 VT1.3 22.625,38.375 24.74,36.26 24.74,35.214 26.214,33.74 29.74,33.74 35.25,39.25 45.5,39.25 48.16,36.59 JK1.6
NetJK1_7: JK1.7 R10.1 | length 9.7
  Top Layer w0.3: JK1.7@50.617,33.19 50.807,33 53,33 56,36 R10.1
NetJK2_1: JK2.1 JK4.14 R12.1 R14.1 X3.1 | length 48.8
  Top Layer w0.3: JK4.14 JK2.1 35.377,22.377 37,24 40.228,24 47.422,16.805 56.657,16.805 57.46,17.608 57.46,17.645 57.747,17.932 R14.1@58,17.932 ; R14.1@58,18 58.11,18.11 58.11,26.174 R12.1 ; R14.1@58.11,18 61.934,18 62.394,17.54 X3.1@63,17.54
NetJK2_6: JK2.6 VD4.2 VT2.3 | length 43.2
  Top Layer w0.3: VD4.2 VT2.3 18.682,33.7 19.682,34.7 22.522,34.7 24.437,32.785 29.215,32.785 31,31 31,29 35,25 43.076,25 46.786,21.29 47.735,21.29 48.077,20.948 JK2.6
NetJK3_6: JK3.6 VD1.2 VT3.3 | length 37.3
  Top Layer w0.3: VT3.3 25.012,36.788 26.4,35.4 VD1.2 ; VD1.2@27.775,35.937 27.775,44.275 35.089,51.589 39.808,51.589 43.457,47.94 JK3.6
NetJK3_8: JK3.8 R13.2 X4.1 | length 14.4
  Top Layer w0.3: JK3.8@50.617,54.81 50.617,55.158 50.959,55.5 54.5,55.5 58,52 58,50 R13.2
NetJK3_14: JK3.14 R10.2 R11.2 R13.1 X2.1 | length 38.8
  Top Layer w0.3: JK3.14@35.377,54.81 35.377,53.81 36.187,53 49,53 56.955,45.045 R13.1 R11.2 ; R10.2 R11.2 ; 63,42 61.955,40.955 R11.2
NetJK4_6: JK4.6 VD2.2 VT4.3 | length 47.4
  Top Layer w0.3: VT4.3 21.512,31.212 VD2.2 22.05,31.2 24,29.25 24,18 31,11 45.75,11 48.077,8.673 JK4.6
NetJK4_8: JK4.8 R14.2 X5.1 | length 18.3
  Top Layer w0.3: JK4.8 53.81,13.81 56.045,16.045 R14.2 58,7.176 57.824,7 57,7
NetR1_1: R1.1 R2.2 VT1.1 | length 7.7
  Top Layer w0.3: R1.1 R2.2 18.899,45.5 19.962,44.437 VT1.1
NetR3_1: R3.1 R4.2 VT2.1 | length 17
  Top Layer w0.3: R3.1 16.358,47.825 16.358,45.808 R4.2 16.3,45.8 11.75,41.25 11.75,38.75 13,37.5 15.05,37.5 16.45,36.1 VT2.1
NetR5_1: R5.1 R6.2 VT3.1 | length 9.1
  Top Layer w0.3: R5.1 R6.2 23.989,45.5 25.739,45.5 25.962,45.277 VT3.1
NetR7_1: R7.1 R8.2 VT4.1 | length 12.5
  Top Layer w0.3: R7.1 R8.2 21.39,45.5 22.5,44.39 v2@22.5,40.25 ; VT4.1 22.468,35.856 22.468,37.35 v2@22.473,37.356
  Bottom Layer w0.3: v2@22.473,37.356 22.473,40.223 v2@22.5,40.25
  other v2: 22.457,37.548 22.502,40.234
NetR9_1: R9.1 X1.1 | length 3.4
  Top Layer w0.3: R9.1 59.955,30.172 60.265,30.482 62.943,30.482 X1.1@63,30.54
pads on no net: JK1.8 JK1.9 JK1.13 JK1.14 JK2.8 JK2.9 JK2.13 JK2.14 JK3.1 JK3.7 JK3.9 JK3.13 JK4.1 JK4.7 JK4.9 JK4.13

## Polygon pours and split planes (outlines as drawn)
+5 on Top Layer "+5_L01_P000" (solid, pour order 0): 37.366,28.634 38.634,28.634 ccw(c38.634,30.097) 40.097,30.097 40.097,35.903 ccw(c39.366,35.903) 39.366,36.634 36.633,36.634 ccw(c36.633,36.098) 36.097,36.098 36.097,29.903 ccw(c37.366,29.903)
+5 on Top Layer "+5_L01_P004" (solid, pour order 4): 37,15 39,15 ccw(c39,16) 40,16 40,22 ccw(c39,22) 39,23 37,23 ccw(c37,22) 36,22 36,16 ccw(c37,16)
+5 on Top Layer "+5_L01_P005" (solid, pour order 5): 36,1 38,1 ccw(c38,2) 39,2 39,8 ccw(c38,8) 38,9 36,9 ccw(c36,8) 35,8 35,2 ccw(c36,2)
+5 on Top Layer "+5_L01_P006" (solid, pour order 6): 39.172,49.552 39.172,44.172 cw(c38.309,44.172) 38.309,43.309 36.691,43.309 cw(c36.691,44.597) 35.403,44.597 35.403,49.425 cw(c35.978,49.425) 35.978,50 38.724,50 cw(c38.724,49.552)
+5 on Top Layer "+5_L01_P007" (solid, pour order 7): 29,31.66 29,28 cw(c28.249,28) 28.249,27.249 25.17,27.249 cw(c25.17,27.747) 24.672,27.747 24.672,31.672 cw(c25.249,31.672) 25.249,32.249 28.411,32.249 cw(c28.411,31.66)
+5 on Top Layer "+5_L01_P008" (solid, pour order 8): 23.468,27.532 23.468,23.468 cw(c23.014,23.468) 23.014,23.014 19.986,23.014 cw(c19.986,23.532) 19.468,23.532 19.468,27.468 cw(c20.014,27.468) 20.014,28.014 22.986,28.014 cw(c22.986,27.532)
+5 on Top Layer "+5_L01_P009" (solid, pour order 9): 13.532,23.468 13.532,27.532 cw(c14.097,27.532) 14.097,28.097 16.903,28.097 cw(c16.903,27.468) 17.532,27.468 17.532,23.532 cw(c17.097,23.532) 17.097,23.097 13.903,23.097 cw(c13.903,23.468)
+5 on Top Layer "+5_L01_P010" (solid, pour order 10): 6,42 9,42 cw(c9,41) 10,41 10,39 cw(c9,39) 9,38 6,38 cw(c6,39) 5,39 5,41 cw(c6,41)
GNDA on Top Layer "GNDA_L01_P011" (solid, remove dead copper, pour order 11): 1,57 1,2 ccw(c2,2) 2,1 63,1 ccw(c63,2) 64,2 64,57 ccw(c63,57) 63,58 2,58 ccw(c2,57)
GNDA on Bottom Layer "GNDA_L02_P013" (solid, remove dead copper, pour order 13): 0,0 65,0 65,59 0,59
+5 on Bottom Layer "Bottom Layer-+5" (solid, pour order 3): 35,1 38,1 ccw(c38,2) 39,2 39,46 ccw(c38,46) 38,47 34,47 ccw(c34,46) 33,46 33,34 cw(c32,34) 32,33 11,33 cw(c11,34) 10,34 10,41 ccw(c9,41) 9,42 5,42 ccw(c5,41) 4,41 4,30 ccw(c5,30) 5,29 12,29 cw(c12,28) 13,28 13,15 cw(c12,15) 12,14 4,14 ccw(c4,13) 3,13 3,11 ccw(c4,11) 4,10 17,10 ccw(c17,11) 18,11 18,22 cw(c19,22) 19,23 25,23 ccw(c25,24) 26,24 26,27 cw(c27,27) 27,28 33,28 cw(c33,27) 34,27 34,2 ccw(c35,2)

## Silkscreen, mask and mechanical layers (free items; w line width, h text height)
Top Overlay:
  text "I-" at 55,54 h3
  text "Key4" at 16.773,52.8 h1.5 r270
  text "Key3" at 19.273,52.8 h1.5 r270
  text "Key2" at 21.773,52.8 h1.5 r270
  text "Key1" at 24.273,52.8 h1.5 r270
  text "U-" at 60,36 h3
  text "U+" at 62,20 h3
  text "+5" at 7,14 h1.5
  text "GND" at 6,6 h1.5
  text "I+" at 55,2 h3
Top Solder:
  the board outline again, w0.1
Bottom Solder:
  the board outline again, w0.1